# Altium PCB copper_suicide.PcbDoc (part 2 of 6)
Units mm, origin at the board's own origin, x right, y up, seen from the top; angles counter-clockwise.
Board outline 200 x 200 mm, 10 copper layers (Top Layer, Signal Layer 1, Signal Layer 2, Signal Layer 3, Signal Layer 4, Signal Layer 5, Signal Layer 6, Signal Layer 7, Signal Layer 8, Bottom Layer), stack 1.555 mm thick; 36 components, 3934 nets, 1640 pads, 0 vias.
Unrouted connection lines stored in the file: 671.
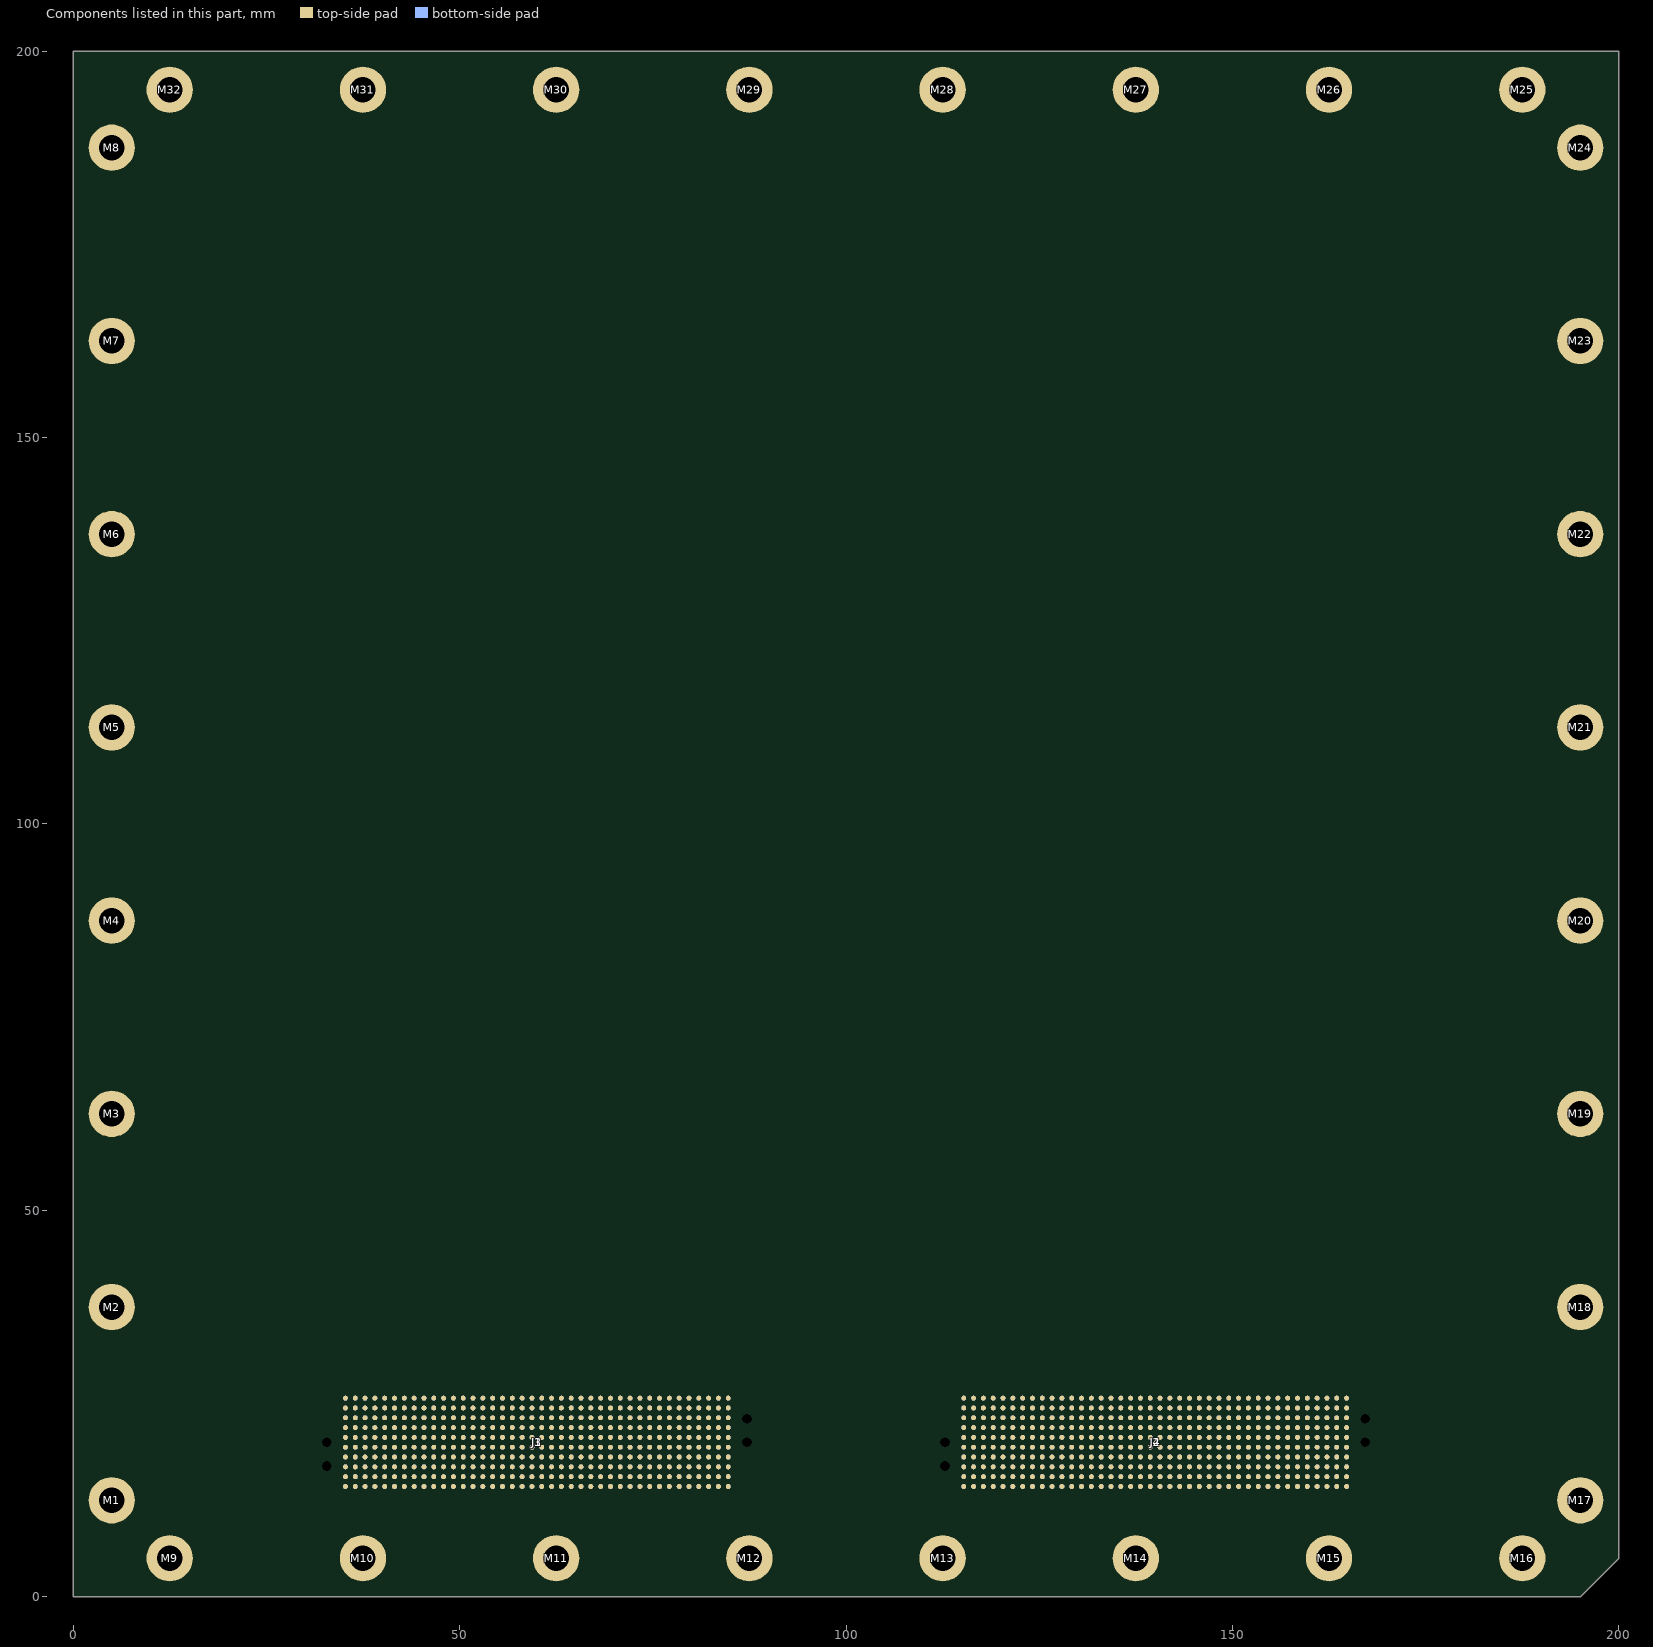
[diagram p2: the components of this part, seen from the top]

## Classes and differential pairs (continued)
net class IL12_31-68_32: IL12_31-68_32.DDRCC.S01C_5_N IL12_31-68_32.DDRCC.S01C_5_P IL12_31-68_32.DDRCC.S2_5 IL12_31-68_32.DDRCC.S3_5 IL12_31-68_32.DDRCC.S4_5 IL12_31-68_32.DDRCC.S5_5 IL12_31-68_32.DDRCC.S6_5 IL12_31-68_32.DDRCC.S7_5 IL12_31-68_32.DDRCC.S8_5 IL12_31-68_32.DDRCC.S9_5 IL12_31-68_32.DDRCC.S10_5 IL12_31-68_32.DDRCC.S11_5 IL12_31-68_32.DDRCC.S12_5 IL12_31-68_32.DDRCC.S13_5 IL12_31-68_32.DDRCC.S14_5 IL12_31-68_32.DDRCC.S15_5 IL12_31-68_32.DDRCC.S16_5 IL12_31-68_32.DDRCC.S17_5 IL12_31-68_32.DDRCC.S18_5 IL12_31-68_32.DDRCC.S19_5 IL12_31-68_32.DDRCC.S20_5 IL12_31-68_32.DDRCC.S21_5 IL12_31-68_32.DDRCC.S22_5 IL12_31-68_32.DDRCC.S23_5 IL12_31-68_32.DDRCC.S24_5 IL12_31-68_32.DDRCC.S25_5 IL12_31-68_32.DDRCC.S26_5 IL12_31-68_32.DDRCC.S27_5 IL12_31-68_32.DDRCC.S28_5 IL12_31-68_32.DDRCC.S29_5 IL12_31-68_32.DDRCC.S30_5 IL12_31-68_32.DDRCC.S31_5 IL12_31-68_32.DDRCC.S32_5 IL12_31-68_32.DDRCC.S33_5 IL12_31-68_32.DDRCC.S34_5 IL12_31-68_32.DDRCC.S35_5 IL12_31-68_32.DDRCC.S36_5 IL12_31-68_32.DDRCC.S37_5 IL12_31-68_32.DDRCC.S38_5 IL12_31-68_32.DDRCC.S39_5 IL12_31-68_32.DDRCC.S40_5 IL12_31-68_32.DDRCC.S41_5 IL12_31-68_32.DDRCC.S42_5 IL12_31-68_32.DDRCC.S43_5 IL12_31-68_32.DDRCC.S44_5 IL12_31-68_32.DDRCC.S45_5 IL12_31-68_32.DDRCC.S46_5 IL12_31-68_32.SDRCC.GPIO8.D0_5 IL12_31-68_32.SDRCC.GPIO8.D1_5 IL12_31-68_32.SDRCC.GPIO8.D2_5 IL12_31-68_32.SDRCC.GPIO8.D3_5 IL12_31-68_32.SDRCC.GPIO8.D4_5 IL12_31-68_32.SDRCC.GPIO8.D5_5 IL12_31-68_32.SDRCC.GPIO8.D6_5 IL12_31-68_32.SDRCC.GPIO8.D7_5 IL12_31-68_32.SDRCC.GPIO15.D01C_5_N IL12_31-68_32.SDRCC.GPIO15.D01C_5_P IL12_31-68_32.SDRCC.GPIO15.D2_5 IL12_31-68_32.SDRCC.GPIO15.D3_5 IL12_31-68_32.SDRCC.GPIO15.D4_5 IL12_31-68_32.SDRCC.GPIO15.D5_5 IL12_31-68_32.SDRCC.GPIO15.D6_5 IL12_31-68_32.SDRCC.GPIO15.D7_5 IL12_31-68_32.SDRCC.GPIO15.D8_5 IL12_31-68_32.SDRCC.GPIO15.D9_5 IL12_31-68_32.SDRCC.GPIO15.D10_5 IL12_31-68_32.SDRCC.GPIO15.D11_5 IL12_31-68_32.SDRCC.GPIO15.D12_5 IL12_31-68_32.SDRCC.GPIO15.D13_5 IL12_31-68_32.SDRCC.GPIO15.D14_5
net class IL12_32-68_33: IL12_32-68_33.DDRCC.S01C_5_N IL12_32-68_33.DDRCC.S01C_5_P IL12_32-68_33.DDRCC.S2_5 IL12_32-68_33.DDRCC.S3_5 IL12_32-68_33.DDRCC.S4_5 IL12_32-68_33.DDRCC.S5_5 IL12_32-68_33.DDRCC.S6_5 IL12_32-68_33.DDRCC.S7_5 IL12_32-68_33.DDRCC.S8_5 IL12_32-68_33.DDRCC.S9_5 IL12_32-68_33.DDRCC.S10_5 IL12_32-68_33.DDRCC.S11_5 IL12_32-68_33.DDRCC.S12_5 IL12_32-68_33.DDRCC.S13_5 IL12_32-68_33.DDRCC.S14_5 IL12_32-68_33.DDRCC.S15_5 IL12_32-68_33.DDRCC.S16_5 IL12_32-68_33.DDRCC.S17_5 IL12_32-68_33.DDRCC.S18_5 IL12_32-68_33.DDRCC.S19_5 IL12_32-68_33.DDRCC.S20_5 IL12_32-68_33.DDRCC.S21_5 IL12_32-68_33.DDRCC.S22_5 IL12_32-68_33.DDRCC.S23_5 IL12_32-68_33.DDRCC.S24_5 IL12_32-68_33.DDRCC.S25_5 IL12_32-68_33.DDRCC.S26_5 IL12_32-68_33.DDRCC.S27_5 IL12_32-68_33.DDRCC.S28_5 IL12_32-68_33.DDRCC.S29_5 IL12_32-68_33.DDRCC.S30_5 IL12_32-68_33.DDRCC.S31_5 IL12_32-68_33.DDRCC.S32_5 IL12_32-68_33.DDRCC.S33_5 IL12_32-68_33.DDRCC.S34_5 IL12_32-68_33.DDRCC.S35_5 IL12_32-68_33.DDRCC.S36_5 IL12_32-68_33.DDRCC.S37_5 IL12_32-68_33.DDRCC.S38_5 IL12_32-68_33.DDRCC.S39_5 IL12_32-68_33.DDRCC.S40_5 IL12_32-68_33.DDRCC.S41_5 IL12_32-68_33.DDRCC.S42_5 IL12_32-68_33.DDRCC.S43_5 IL12_32-68_33.DDRCC.S44_5 IL12_32-68_33.DDRCC.S45_5 IL12_32-68_33.DDRCC.S46_5 IL12_32-68_33.SDRCC.GPIO8.D0_5 IL12_32-68_33.SDRCC.GPIO8.D1_5 IL12_32-68_33.SDRCC.GPIO8.D2_5 IL12_32-68_33.SDRCC.GPIO8.D3_5 IL12_32-68_33.SDRCC.GPIO8.D4_5 IL12_32-68_33.SDRCC.GPIO8.D5_5 IL12_32-68_33.SDRCC.GPIO8.D6_5 IL12_32-68_33.SDRCC.GPIO8.D7_5 IL12_32-68_33.SDRCC.GPIO15.D01C_5_N IL12_32-68_33.SDRCC.GPIO15.D01C_5_P IL12_32-68_33.SDRCC.GPIO15.D2_5 IL12_32-68_33.SDRCC.GPIO15.D3_5 IL12_32-68_33.SDRCC.GPIO15.D4_5 IL12_32-68_33.SDRCC.GPIO15.D5_5 IL12_32-68_33.SDRCC.GPIO15.D6_5 IL12_32-68_33.SDRCC.GPIO15.D7_5 IL12_32-68_33.SDRCC.GPIO15.D8_5 IL12_32-68_33.SDRCC.GPIO15.D9_5 IL12_32-68_33.SDRCC.GPIO15.D10_5 IL12_32-68_33.SDRCC.GPIO15.D11_5 IL12_32-68_33.SDRCC.GPIO15.D12_5 IL12_32-68_33.SDRCC.GPIO15.D13_5 IL12_32-68_33.SDRCC.GPIO15.D14_5
net class IL12_33-J1A: IL12_33-J1A.DDRCC.S01C_5_N IL12_33-J1A.DDRCC.S01C_5_P IL12_33-J1A.DDRCC.S2_5 IL12_33-J1A.DDRCC.S3_5 IL12_33-J1A.DDRCC.S4_5 IL12_33-J1A.DDRCC.S5_5 IL12_33-J1A.DDRCC.S6_5 IL12_33-J1A.DDRCC.S7_5 IL12_33-J1A.DDRCC.S8_5 IL12_33-J1A.DDRCC.S9_5 IL12_33-J1A.DDRCC.S10_5 IL12_33-J1A.DDRCC.S11_5 IL12_33-J1A.DDRCC.S12_5 IL12_33-J1A.DDRCC.S13_5 IL12_33-J1A.DDRCC.S14_5 IL12_33-J1A.DDRCC.S15_5 IL12_33-J1A.DDRCC.S16_5 IL12_33-J1A.DDRCC.S17_5 IL12_33-J1A.DDRCC.S18_5 IL12_33-J1A.DDRCC.S19_5 IL12_33-J1A.DDRCC.S20_5 IL12_33-J1A.DDRCC.S21_5 IL12_33-J1A.DDRCC.S22_5 IL12_33-J1A.DDRCC.S23_5 IL12_33-J1A.DDRCC.S24_5 IL12_33-J1A.DDRCC.S25_5 IL12_33-J1A.DDRCC.S26_5 IL12_33-J1A.DDRCC.S27_5 IL12_33-J1A.DDRCC.S28_5 IL12_33-J1A.DDRCC.S29_5 IL12_33-J1A.DDRCC.S30_5 IL12_33-J1A.DDRCC.S31_5 IL12_33-J1A.DDRCC.S32_5 IL12_33-J1A.DDRCC.S33_5 IL12_33-J1A.DDRCC.S34_5 IL12_33-J1A.DDRCC.S35_5 IL12_33-J1A.DDRCC.S36_5 IL12_33-J1A.DDRCC.S37_5 IL12_33-J1A.DDRCC.S38_5 IL12_33-J1A.DDRCC.S39_5 IL12_33-J1A.DDRCC.S40_5 IL12_33-J1A.DDRCC.S41_5 IL12_33-J1A.DDRCC.S42_5 IL12_33-J1A.DDRCC.S43_5 IL12_33-J1A.DDRCC.S44_5 IL12_33-J1A.DDRCC.S45_5 IL12_33-J1A.DDRCC.S46_5 IL12_33-J1A.SDRCC.GPIO8.D0_5 IL12_33-J1A.SDRCC.GPIO8.D1_5 IL12_33-J1A.SDRCC.GPIO8.D2_5 IL12_33-J1A.SDRCC.GPIO8.D3_5 IL12_33-J1A.SDRCC.GPIO8.D4_5 IL12_33-J1A.SDRCC.GPIO8.D5_5 IL12_33-J1A.SDRCC.GPIO8.D6_5 IL12_33-J1A.SDRCC.GPIO8.D7_5 IL12_33-J1A.SDRCC.GPIO15.D01C_5_N IL12_33-J1A.SDRCC.GPIO15.D01C_5_P IL12_33-J1A.SDRCC.GPIO15.D2_5 IL12_33-J1A.SDRCC.GPIO15.D3_5 IL12_33-J1A.SDRCC.GPIO15.D4_5 IL12_33-J1A.SDRCC.GPIO15.D5_5 IL12_33-J1A.SDRCC.GPIO15.D6_5 IL12_33-J1A.SDRCC.GPIO15.D7_5 IL12_33-J1A.SDRCC.GPIO15.D8_5 IL12_33-J1A.SDRCC.GPIO15.D9_5 IL12_33-J1A.SDRCC.GPIO15.D10_5 IL12_33-J1A.SDRCC.GPIO15.D11_5 IL12_33-J1A.SDRCC.GPIO15.D12_5 IL12_33-J1A.SDRCC.GPIO15.D13_5 IL12_33-J1A.SDRCC.GPIO15.D14_5
net class IL34_10-07_20: IL34_10-07_20.DDRCC.S01C_5_N IL34_10-07_20.DDRCC.S01C_5_P IL34_10-07_20.DDRCC.S2_5 IL34_10-07_20.DDRCC.S3_5 IL34_10-07_20.DDRCC.S4_5 IL34_10-07_20.DDRCC.S5_5 IL34_10-07_20.DDRCC.S6_5 IL34_10-07_20.DDRCC.S7_5 IL34_10-07_20.DDRCC.S8_5 IL34_10-07_20.DDRCC.S9_5 IL34_10-07_20.DDRCC.S10_5 IL34_10-07_20.DDRCC.S11_5 IL34_10-07_20.DDRCC.S12_5 IL34_10-07_20.DDRCC.S13_5 IL34_10-07_20.DDRCC.S14_5 IL34_10-07_20.DDRCC.S15_5 IL34_10-07_20.DDRCC.S16_5 IL34_10-07_20.DDRCC.S17_5 IL34_10-07_20.DDRCC.S18_5 IL34_10-07_20.DDRCC.S19_5 IL34_10-07_20.DDRCC.S20_5 IL34_10-07_20.DDRCC.S21_5 IL34_10-07_20.DDRCC.S22_5 IL34_10-07_20.DDRCC.S23_5 IL34_10-07_20.DDRCC.S24_5 IL34_10-07_20.DDRCC.S25_5 IL34_10-07_20.DDRCC.S26_5 IL34_10-07_20.DDRCC.S27_5 IL34_10-07_20.DDRCC.S28_5 IL34_10-07_20.DDRCC.S29_5 IL34_10-07_20.DDRCC.S30_5 IL34_10-07_20.DDRCC.S31_5 IL34_10-07_20.DDRCC.S32_5 IL34_10-07_20.DDRCC.S33_5 IL34_10-07_20.DDRCC.S34_5 IL34_10-07_20.DDRCC.S35_5 IL34_10-07_20.DDRCC.S36_5 IL34_10-07_20.DDRCC.S37_5 IL34_10-07_20.DDRCC.S38_5 IL34_10-07_20.DDRCC.S39_5 IL34_10-07_20.DDRCC.S40_5 IL34_10-07_20.DDRCC.S41_5 IL34_10-07_20.DDRCC.S42_5 IL34_10-07_20.DDRCC.S43_5 IL34_10-07_20.DDRCC.S44_5 IL34_10-07_20.DDRCC.S45_5 IL34_10-07_20.DDRCC.S46_5 IL34_10-07_20.SDRCC.GPIO8.D0_5 IL34_10-07_20.SDRCC.GPIO8.D1_5 IL34_10-07_20.SDRCC.GPIO8.D2_5 IL34_10-07_20.SDRCC.GPIO8.D3_5 IL34_10-07_20.SDRCC.GPIO8.D4_5 IL34_10-07_20.SDRCC.GPIO8.D5_5 IL34_10-07_20.SDRCC.GPIO8.D6_5 IL34_10-07_20.SDRCC.GPIO8.D7_5 IL34_10-07_20.SDRCC.GPIO15.D01C_5_N IL34_10-07_20.SDRCC.GPIO15.D01C_5_P IL34_10-07_20.SDRCC.GPIO15.D2_5 IL34_10-07_20.SDRCC.GPIO15.D3_5 IL34_10-07_20.SDRCC.GPIO15.D4_5 IL34_10-07_20.SDRCC.GPIO15.D5_5 IL34_10-07_20.SDRCC.GPIO15.D6_5 IL34_10-07_20.SDRCC.GPIO15.D7_5 IL34_10-07_20.SDRCC.GPIO15.D8_5 IL34_10-07_20.SDRCC.GPIO15.D9_5 IL34_10-07_20.SDRCC.GPIO15.D10_5 IL34_10-07_20.SDRCC.GPIO15.D11_5 IL34_10-07_20.SDRCC.GPIO15.D12_5 IL34_10-07_20.SDRCC.GPIO15.D13_5 IL34_10-07_20.SDRCC.GPIO15.D14_5
net class IL34_11-07_21: IL34_11-07_21.DDRCC.S01C_5_N IL34_11-07_21.DDRCC.S01C_5_P IL34_11-07_21.DDRCC.S2_5 IL34_11-07_21.DDRCC.S3_5 IL34_11-07_21.DDRCC.S4_5 IL34_11-07_21.DDRCC.S5_5 IL34_11-07_21.DDRCC.S6_5 IL34_11-07_21.DDRCC.S7_5 IL34_11-07_21.DDRCC.S8_5 IL34_11-07_21.DDRCC.S9_5 IL34_11-07_21.DDRCC.S10_5 IL34_11-07_21.DDRCC.S11_5 IL34_11-07_21.DDRCC.S12_5 IL34_11-07_21.DDRCC.S13_5 IL34_11-07_21.DDRCC.S14_5 IL34_11-07_21.DDRCC.S15_5 IL34_11-07_21.DDRCC.S16_5 IL34_11-07_21.DDRCC.S17_5 IL34_11-07_21.DDRCC.S18_5 IL34_11-07_21.DDRCC.S19_5 IL34_11-07_21.DDRCC.S20_5 IL34_11-07_21.DDRCC.S21_5 IL34_11-07_21.DDRCC.S22_5 IL34_11-07_21.DDRCC.S23_5 IL34_11-07_21.DDRCC.S24_5 IL34_11-07_21.DDRCC.S25_5 IL34_11-07_21.DDRCC.S26_5 IL34_11-07_21.DDRCC.S27_5 IL34_11-07_21.DDRCC.S28_5 IL34_11-07_21.DDRCC.S29_5 IL34_11-07_21.DDRCC.S30_5 IL34_11-07_21.DDRCC.S31_5 IL34_11-07_21.DDRCC.S32_5 IL34_11-07_21.DDRCC.S33_5 IL34_11-07_21.DDRCC.S34_5 IL34_11-07_21.DDRCC.S35_5 IL34_11-07_21.DDRCC.S36_5 IL34_11-07_21.DDRCC.S37_5 IL34_11-07_21.DDRCC.S38_5 IL34_11-07_21.DDRCC.S39_5 IL34_11-07_21.DDRCC.S40_5 IL34_11-07_21.DDRCC.S41_5 IL34_11-07_21.DDRCC.S42_5 IL34_11-07_21.DDRCC.S43_5 IL34_11-07_21.DDRCC.S44_5 IL34_11-07_21.DDRCC.S45_5 IL34_11-07_21.DDRCC.S46_5 IL34_11-07_21.SDRCC.GPIO8.D0_5 IL34_11-07_21.SDRCC.GPIO8.D1_5 IL34_11-07_21.SDRCC.GPIO8.D2_5 IL34_11-07_21.SDRCC.GPIO8.D3_5 IL34_11-07_21.SDRCC.GPIO8.D4_5 IL34_11-07_21.SDRCC.GPIO8.D5_5 IL34_11-07_21.SDRCC.GPIO8.D6_5 IL34_11-07_21.SDRCC.GPIO8.D7_5 IL34_11-07_21.SDRCC.GPIO15.D01C_5_N IL34_11-07_21.SDRCC.GPIO15.D01C_5_P IL34_11-07_21.SDRCC.GPIO15.D2_5 IL34_11-07_21.SDRCC.GPIO15.D3_5 IL34_11-07_21.SDRCC.GPIO15.D4_5 IL34_11-07_21.SDRCC.GPIO15.D5_5 IL34_11-07_21.SDRCC.GPIO15.D6_5 IL34_11-07_21.SDRCC.GPIO15.D7_5 IL34_11-07_21.SDRCC.GPIO15.D8_5 IL34_11-07_21.SDRCC.GPIO15.D9_5 IL34_11-07_21.SDRCC.GPIO15.D10_5 IL34_11-07_21.SDRCC.GPIO15.D11_5 IL34_11-07_21.SDRCC.GPIO15.D12_5 IL34_11-07_21.SDRCC.GPIO15.D13_5 IL34_11-07_21.SDRCC.GPIO15.D14_5
net class IL34_12-07_22: IL34_12-07_22.DDRCC.S01C_5_N IL34_12-07_22.DDRCC.S01C_5_P IL34_12-07_22.DDRCC.S2_5 IL34_12-07_22.DDRCC.S3_5 IL34_12-07_22.DDRCC.S4_5 IL34_12-07_22.DDRCC.S5_5 IL34_12-07_22.DDRCC.S6_5 IL34_12-07_22.DDRCC.S7_5 IL34_12-07_22.DDRCC.S8_5 IL34_12-07_22.DDRCC.S9_5 IL34_12-07_22.DDRCC.S10_5 IL34_12-07_22.DDRCC.S11_5 IL34_12-07_22.DDRCC.S12_5 IL34_12-07_22.DDRCC.S13_5 IL34_12-07_22.DDRCC.S14_5 IL34_12-07_22.DDRCC.S15_5 IL34_12-07_22.DDRCC.S16_5 IL34_12-07_22.DDRCC.S17_5 IL34_12-07_22.DDRCC.S18_5 IL34_12-07_22.DDRCC.S19_5 IL34_12-07_22.DDRCC.S20_5 IL34_12-07_22.DDRCC.S21_5 IL34_12-07_22.DDRCC.S22_5 IL34_12-07_22.DDRCC.S23_5 IL34_12-07_22.DDRCC.S24_5 IL34_12-07_22.DDRCC.S25_5 IL34_12-07_22.DDRCC.S26_5 IL34_12-07_22.DDRCC.S27_5 IL34_12-07_22.DDRCC.S28_5 IL34_12-07_22.DDRCC.S29_5 IL34_12-07_22.DDRCC.S30_5 IL34_12-07_22.DDRCC.S31_5 IL34_12-07_22.DDRCC.S32_5 IL34_12-07_22.DDRCC.S33_5 IL34_12-07_22.DDRCC.S34_5 IL34_12-07_22.DDRCC.S35_5 IL34_12-07_22.DDRCC.S36_5 IL34_12-07_22.DDRCC.S37_5 IL34_12-07_22.DDRCC.S38_5 IL34_12-07_22.DDRCC.S39_5 IL34_12-07_22.DDRCC.S40_5 IL34_12-07_22.DDRCC.S41_5 IL34_12-07_22.DDRCC.S42_5 IL34_12-07_22.DDRCC.S43_5 IL34_12-07_22.DDRCC.S44_5 IL34_12-07_22.DDRCC.S45_5 IL34_12-07_22.DDRCC.S46_5 IL34_12-07_22.SDRCC.GPIO8.D0_5 IL34_12-07_22.SDRCC.GPIO8.D1_5 IL34_12-07_22.SDRCC.GPIO8.D2_5 IL34_12-07_22.SDRCC.GPIO8.D3_5 IL34_12-07_22.SDRCC.GPIO8.D4_5 IL34_12-07_22.SDRCC.GPIO8.D5_5 IL34_12-07_22.SDRCC.GPIO8.D6_5 IL34_12-07_22.SDRCC.GPIO8.D7_5 IL34_12-07_22.SDRCC.GPIO15.D01C_5_N IL34_12-07_22.SDRCC.GPIO15.D01C_5_P IL34_12-07_22.SDRCC.GPIO15.D2_5 IL34_12-07_22.SDRCC.GPIO15.D3_5 IL34_12-07_22.SDRCC.GPIO15.D4_5 IL34_12-07_22.SDRCC.GPIO15.D5_5 IL34_12-07_22.SDRCC.GPIO15.D6_5 IL34_12-07_22.SDRCC.GPIO15.D7_5 IL34_12-07_22.SDRCC.GPIO15.D8_5 IL34_12-07_22.SDRCC.GPIO15.D9_5 IL34_12-07_22.SDRCC.GPIO15.D10_5 IL34_12-07_22.SDRCC.GPIO15.D11_5 IL34_12-07_22.SDRCC.GPIO15.D12_5 IL34_12-07_22.SDRCC.GPIO15.D13_5 IL34_12-07_22.SDRCC.GPIO15.D14_5
net class IL34_13-07_23: IL34_13-07_23.DDRCC.S01C_5_N IL34_13-07_23.DDRCC.S01C_5_P IL34_13-07_23.DDRCC.S2_5 IL34_13-07_23.DDRCC.S3_5 IL34_13-07_23.DDRCC.S4_5 IL34_13-07_23.DDRCC.S5_5 IL34_13-07_23.DDRCC.S6_5 IL34_13-07_23.DDRCC.S7_5 IL34_13-07_23.DDRCC.S8_5 IL34_13-07_23.DDRCC.S9_5 IL34_13-07_23.DDRCC.S10_5 IL34_13-07_23.DDRCC.S11_5 IL34_13-07_23.DDRCC.S12_5 IL34_13-07_23.DDRCC.S13_5 IL34_13-07_23.DDRCC.S14_5 IL34_13-07_23.DDRCC.S15_5 IL34_13-07_23.DDRCC.S16_5 IL34_13-07_23.DDRCC.S17_5 IL34_13-07_23.DDRCC.S18_5 IL34_13-07_23.DDRCC.S19_5 IL34_13-07_23.DDRCC.S20_5 IL34_13-07_23.DDRCC.S21_5 IL34_13-07_23.DDRCC.S22_5 IL34_13-07_23.DDRCC.S23_5 IL34_13-07_23.DDRCC.S24_5 IL34_13-07_23.DDRCC.S25_5 IL34_13-07_23.DDRCC.S26_5 IL34_13-07_23.DDRCC.S27_5 IL34_13-07_23.DDRCC.S28_5 IL34_13-07_23.DDRCC.S29_5 IL34_13-07_23.DDRCC.S30_5 IL34_13-07_23.DDRCC.S31_5 IL34_13-07_23.DDRCC.S32_5 IL34_13-07_23.DDRCC.S33_5 IL34_13-07_23.DDRCC.S34_5 IL34_13-07_23.DDRCC.S35_5 IL34_13-07_23.DDRCC.S36_5 IL34_13-07_23.DDRCC.S37_5 IL34_13-07_23.DDRCC.S38_5 IL34_13-07_23.DDRCC.S39_5 IL34_13-07_23.DDRCC.S40_5 IL34_13-07_23.DDRCC.S41_5 IL34_13-07_23.DDRCC.S42_5 IL34_13-07_23.DDRCC.S43_5 IL34_13-07_23.DDRCC.S44_5 IL34_13-07_23.DDRCC.S45_5 IL34_13-07_23.DDRCC.S46_5 IL34_13-07_23.SDRCC.GPIO8.D0_5 IL34_13-07_23.SDRCC.GPIO8.D1_5 IL34_13-07_23.SDRCC.GPIO8.D2_5 IL34_13-07_23.SDRCC.GPIO8.D3_5 IL34_13-07_23.SDRCC.GPIO8.D4_5 IL34_13-07_23.SDRCC.GPIO8.D5_5 IL34_13-07_23.SDRCC.GPIO8.D6_5 IL34_13-07_23.SDRCC.GPIO8.D7_5 IL34_13-07_23.SDRCC.GPIO15.D01C_5_N IL34_13-07_23.SDRCC.GPIO15.D01C_5_P IL34_13-07_23.SDRCC.GPIO15.D2_5 IL34_13-07_23.SDRCC.GPIO15.D3_5 IL34_13-07_23.SDRCC.GPIO15.D4_5 IL34_13-07_23.SDRCC.GPIO15.D5_5 IL34_13-07_23.SDRCC.GPIO15.D6_5 IL34_13-07_23.SDRCC.GPIO15.D7_5 IL34_13-07_23.SDRCC.GPIO15.D8_5 IL34_13-07_23.SDRCC.GPIO15.D9_5 IL34_13-07_23.SDRCC.GPIO15.D10_5 IL34_13-07_23.SDRCC.GPIO15.D11_5 IL34_13-07_23.SDRCC.GPIO15.D12_5 IL34_13-07_23.SDRCC.GPIO15.D13_5 IL34_13-07_23.SDRCC.GPIO15.D14_5
net class IL34_20-07_30: IL34_20-07_30.DDRCC.S01C_5_N IL34_20-07_30.DDRCC.S01C_5_P IL34_20-07_30.DDRCC.S2_5 IL34_20-07_30.DDRCC.S3_5 IL34_20-07_30.DDRCC.S4_5 IL34_20-07_30.DDRCC.S5_5 IL34_20-07_30.DDRCC.S6_5 IL34_20-07_30.DDRCC.S7_5 IL34_20-07_30.DDRCC.S8_5 IL34_20-07_30.DDRCC.S9_5 IL34_20-07_30.DDRCC.S10_5 IL34_20-07_30.DDRCC.S11_5 IL34_20-07_30.DDRCC.S12_5 IL34_20-07_30.DDRCC.S13_5 IL34_20-07_30.DDRCC.S14_5 IL34_20-07_30.DDRCC.S15_5 IL34_20-07_30.DDRCC.S16_5 IL34_20-07_30.DDRCC.S17_5 IL34_20-07_30.DDRCC.S18_5 IL34_20-07_30.DDRCC.S19_5 IL34_20-07_30.DDRCC.S20_5 IL34_20-07_30.DDRCC.S21_5 IL34_20-07_30.DDRCC.S22_5 IL34_20-07_30.DDRCC.S23_5 IL34_20-07_30.DDRCC.S24_5 IL34_20-07_30.DDRCC.S25_5 IL34_20-07_30.DDRCC.S26_5 IL34_20-07_30.DDRCC.S27_5 IL34_20-07_30.DDRCC.S28_5 IL34_20-07_30.DDRCC.S29_5 IL34_20-07_30.DDRCC.S30_5 IL34_20-07_30.DDRCC.S31_5 IL34_20-07_30.DDRCC.S32_5 IL34_20-07_30.DDRCC.S33_5 IL34_20-07_30.DDRCC.S34_5 IL34_20-07_30.DDRCC.S35_5 IL34_20-07_30.DDRCC.S36_5 IL34_20-07_30.DDRCC.S37_5 IL34_20-07_30.DDRCC.S38_5 IL34_20-07_30.DDRCC.S39_5 IL34_20-07_30.DDRCC.S40_5 IL34_20-07_30.DDRCC.S41_5 IL34_20-07_30.DDRCC.S42_5 IL34_20-07_30.DDRCC.S43_5 IL34_20-07_30.DDRCC.S44_5 IL34_20-07_30.DDRCC.S45_5 IL34_20-07_30.DDRCC.S46_5 IL34_20-07_30.SDRCC.GPIO8.D0_5 IL34_20-07_30.SDRCC.GPIO8.D1_5 IL34_20-07_30.SDRCC.GPIO8.D2_5 IL34_20-07_30.SDRCC.GPIO8.D3_5 IL34_20-07_30.SDRCC.GPIO8.D4_5 IL34_20-07_30.SDRCC.GPIO8.D5_5 IL34_20-07_30.SDRCC.GPIO8.D6_5 IL34_20-07_30.SDRCC.GPIO8.D7_5 IL34_20-07_30.SDRCC.GPIO15.D01C_5_N IL34_20-07_30.SDRCC.GPIO15.D01C_5_P IL34_20-07_30.SDRCC.GPIO15.D2_5 IL34_20-07_30.SDRCC.GPIO15.D3_5 IL34_20-07_30.SDRCC.GPIO15.D4_5 IL34_20-07_30.SDRCC.GPIO15.D5_5 IL34_20-07_30.SDRCC.GPIO15.D6_5 IL34_20-07_30.SDRCC.GPIO15.D7_5 IL34_20-07_30.SDRCC.GPIO15.D8_5 IL34_20-07_30.SDRCC.GPIO15.D9_5 IL34_20-07_30.SDRCC.GPIO15.D10_5 IL34_20-07_30.SDRCC.GPIO15.D11_5 IL34_20-07_30.SDRCC.GPIO15.D12_5 IL34_20-07_30.SDRCC.GPIO15.D13_5 IL34_20-07_30.SDRCC.GPIO15.D14_5
net class IL34_21-07_31: IL34_21-07_31.DDRCC.S01C_5_N IL34_21-07_31.DDRCC.S01C_5_P IL34_21-07_31.DDRCC.S2_5 IL34_21-07_31.DDRCC.S3_5 IL34_21-07_31.DDRCC.S4_5 IL34_21-07_31.DDRCC.S5_5 IL34_21-07_31.DDRCC.S6_5 IL34_21-07_31.DDRCC.S7_5 IL34_21-07_31.DDRCC.S8_5 IL34_21-07_31.DDRCC.S9_5 IL34_21-07_31.DDRCC.S10_5 IL34_21-07_31.DDRCC.S11_5 IL34_21-07_31.DDRCC.S12_5 IL34_21-07_31.DDRCC.S13_5 IL34_21-07_31.DDRCC.S14_5 IL34_21-07_31.DDRCC.S15_5 IL34_21-07_31.DDRCC.S16_5 IL34_21-07_31.DDRCC.S17_5 IL34_21-07_31.DDRCC.S18_5 IL34_21-07_31.DDRCC.S19_5 IL34_21-07_31.DDRCC.S20_5 IL34_21-07_31.DDRCC.S21_5 IL34_21-07_31.DDRCC.S22_5 IL34_21-07_31.DDRCC.S23_5 IL34_21-07_31.DDRCC.S24_5 IL34_21-07_31.DDRCC.S25_5 IL34_21-07_31.DDRCC.S26_5 IL34_21-07_31.DDRCC.S27_5 IL34_21-07_31.DDRCC.S28_5 IL34_21-07_31.DDRCC.S29_5 IL34_21-07_31.DDRCC.S30_5 IL34_21-07_31.DDRCC.S31_5 IL34_21-07_31.DDRCC.S32_5 IL34_21-07_31.DDRCC.S33_5 IL34_21-07_31.DDRCC.S34_5 IL34_21-07_31.DDRCC.S35_5 IL34_21-07_31.DDRCC.S36_5 IL34_21-07_31.DDRCC.S37_5 IL34_21-07_31.DDRCC.S38_5 IL34_21-07_31.DDRCC.S39_5 IL34_21-07_31.DDRCC.S40_5 IL34_21-07_31.DDRCC.S41_5 IL34_21-07_31.DDRCC.S42_5 IL34_21-07_31.DDRCC.S43_5 IL34_21-07_31.DDRCC.S44_5 IL34_21-07_31.DDRCC.S45_5 IL34_21-07_31.DDRCC.S46_5 IL34_21-07_31.SDRCC.GPIO8.D0_5 IL34_21-07_31.SDRCC.GPIO8.D1_5 IL34_21-07_31.SDRCC.GPIO8.D2_5 IL34_21-07_31.SDRCC.GPIO8.D3_5 IL34_21-07_31.SDRCC.GPIO8.D4_5 IL34_21-07_31.SDRCC.GPIO8.D5_5 IL34_21-07_31.SDRCC.GPIO8.D6_5 IL34_21-07_31.SDRCC.GPIO8.D7_5 IL34_21-07_31.SDRCC.GPIO15.D01C_5_N IL34_21-07_31.SDRCC.GPIO15.D01C_5_P IL34_21-07_31.SDRCC.GPIO15.D2_5 IL34_21-07_31.SDRCC.GPIO15.D3_5 IL34_21-07_31.SDRCC.GPIO15.D4_5 IL34_21-07_31.SDRCC.GPIO15.D5_5 IL34_21-07_31.SDRCC.GPIO15.D6_5 IL34_21-07_31.SDRCC.GPIO15.D7_5 IL34_21-07_31.SDRCC.GPIO15.D8_5 IL34_21-07_31.SDRCC.GPIO15.D9_5 IL34_21-07_31.SDRCC.GPIO15.D10_5 IL34_21-07_31.SDRCC.GPIO15.D11_5 IL34_21-07_31.SDRCC.GPIO15.D12_5 IL34_21-07_31.SDRCC.GPIO15.D13_5 IL34_21-07_31.SDRCC.GPIO15.D14_5
net class IL34_22-07_32: IL34_22-07_32.DDRCC.S01C_5_N IL34_22-07_32.DDRCC.S01C_5_P IL34_22-07_32.DDRCC.S2_5 IL34_22-07_32.DDRCC.S3_5 IL34_22-07_32.DDRCC.S4_5 IL34_22-07_32.DDRCC.S5_5 IL34_22-07_32.DDRCC.S6_5 IL34_22-07_32.DDRCC.S7_5 IL34_22-07_32.DDRCC.S8_5 IL34_22-07_32.DDRCC.S9_5 IL34_22-07_32.DDRCC.S10_5 IL34_22-07_32.DDRCC.S11_5 IL34_22-07_32.DDRCC.S12_5 IL34_22-07_32.DDRCC.S13_5 IL34_22-07_32.DDRCC.S14_5 IL34_22-07_32.DDRCC.S15_5 IL34_22-07_32.DDRCC.S16_5 IL34_22-07_32.DDRCC.S17_5 IL34_22-07_32.DDRCC.S18_5 IL34_22-07_32.DDRCC.S19_5 IL34_22-07_32.DDRCC.S20_5 IL34_22-07_32.DDRCC.S21_5 IL34_22-07_32.DDRCC.S22_5 IL34_22-07_32.DDRCC.S23_5 IL34_22-07_32.DDRCC.S24_5 IL34_22-07_32.DDRCC.S25_5 IL34_22-07_32.DDRCC.S26_5 IL34_22-07_32.DDRCC.S27_5 IL34_22-07_32.DDRCC.S28_5 IL34_22-07_32.DDRCC.S29_5 IL34_22-07_32.DDRCC.S30_5 IL34_22-07_32.DDRCC.S31_5 IL34_22-07_32.DDRCC.S32_5 IL34_22-07_32.DDRCC.S33_5 IL34_22-07_32.DDRCC.S34_5 IL34_22-07_32.DDRCC.S35_5 IL34_22-07_32.DDRCC.S36_5 IL34_22-07_32.DDRCC.S37_5 IL34_22-07_32.DDRCC.S38_5 IL34_22-07_32.DDRCC.S39_5 IL34_22-07_32.DDRCC.S40_5 IL34_22-07_32.DDRCC.S41_5 IL34_22-07_32.DDRCC.S42_5 IL34_22-07_32.DDRCC.S43_5 IL34_22-07_32.DDRCC.S44_5 IL34_22-07_32.DDRCC.S45_5 IL34_22-07_32.DDRCC.S46_5 IL34_22-07_32.SDRCC.GPIO8.D0_5 IL34_22-07_32.SDRCC.GPIO8.D1_5 IL34_22-07_32.SDRCC.GPIO8.D2_5 IL34_22-07_32.SDRCC.GPIO8.D3_5 IL34_22-07_32.SDRCC.GPIO8.D4_5 IL34_22-07_32.SDRCC.GPIO8.D5_5 IL34_22-07_32.SDRCC.GPIO8.D6_5 IL34_22-07_32.SDRCC.GPIO8.D7_5 IL34_22-07_32.SDRCC.GPIO15.D01C_5_N IL34_22-07_32.SDRCC.GPIO15.D01C_5_P IL34_22-07_32.SDRCC.GPIO15.D2_5 IL34_22-07_32.SDRCC.GPIO15.D3_5 IL34_22-07_32.SDRCC.GPIO15.D4_5 IL34_22-07_32.SDRCC.GPIO15.D5_5 IL34_22-07_32.SDRCC.GPIO15.D6_5 IL34_22-07_32.SDRCC.GPIO15.D7_5 IL34_22-07_32.SDRCC.GPIO15.D8_5 IL34_22-07_32.SDRCC.GPIO15.D9_5 IL34_22-07_32.SDRCC.GPIO15.D10_5 IL34_22-07_32.SDRCC.GPIO15.D11_5 IL34_22-07_32.SDRCC.GPIO15.D12_5 IL34_22-07_32.SDRCC.GPIO15.D13_5 IL34_22-07_32.SDRCC.GPIO15.D14_5
net class IL34_23-07_33: IL34_23-07_33.DDRCC.S01C_5_N IL34_23-07_33.DDRCC.S01C_5_P IL34_23-07_33.DDRCC.S2_5 IL34_23-07_33.DDRCC.S3_5 IL34_23-07_33.DDRCC.S4_5 IL34_23-07_33.DDRCC.S5_5 IL34_23-07_33.DDRCC.S6_5 IL34_23-07_33.DDRCC.S7_5 IL34_23-07_33.DDRCC.S8_5 IL34_23-07_33.DDRCC.S9_5 IL34_23-07_33.DDRCC.S10_5 IL34_23-07_33.DDRCC.S11_5 IL34_23-07_33.DDRCC.S12_5 IL34_23-07_33.DDRCC.S13_5 IL34_23-07_33.DDRCC.S14_5 IL34_23-07_33.DDRCC.S15_5 IL34_23-07_33.DDRCC.S16_5 IL34_23-07_33.DDRCC.S17_5 IL34_23-07_33.DDRCC.S18_5 IL34_23-07_33.DDRCC.S19_5 IL34_23-07_33.DDRCC.S20_5 IL34_23-07_33.DDRCC.S21_5 IL34_23-07_33.DDRCC.S22_5 IL34_23-07_33.DDRCC.S23_5 IL34_23-07_33.DDRCC.S24_5 IL34_23-07_33.DDRCC.S25_5 IL34_23-07_33.DDRCC.S26_5 IL34_23-07_33.DDRCC.S27_5 IL34_23-07_33.DDRCC.S28_5 IL34_23-07_33.DDRCC.S29_5 IL34_23-07_33.DDRCC.S30_5 IL34_23-07_33.DDRCC.S31_5 IL34_23-07_33.DDRCC.S32_5 IL34_23-07_33.DDRCC.S33_5 IL34_23-07_33.DDRCC.S34_5 IL34_23-07_33.DDRCC.S35_5 IL34_23-07_33.DDRCC.S36_5 IL34_23-07_33.DDRCC.S37_5 IL34_23-07_33.DDRCC.S38_5 IL34_23-07_33.DDRCC.S39_5 IL34_23-07_33.DDRCC.S40_5 IL34_23-07_33.DDRCC.S41_5 IL34_23-07_33.DDRCC.S42_5 IL34_23-07_33.DDRCC.S43_5 IL34_23-07_33.DDRCC.S44_5 IL34_23-07_33.DDRCC.S45_5 IL34_23-07_33.DDRCC.S46_5 IL34_23-07_33.SDRCC.GPIO8.D0_5 IL34_23-07_33.SDRCC.GPIO8.D1_5 IL34_23-07_33.SDRCC.GPIO8.D2_5 IL34_23-07_33.SDRCC.GPIO8.D3_5 IL34_23-07_33.SDRCC.GPIO8.D4_5 IL34_23-07_33.SDRCC.GPIO8.D5_5 IL34_23-07_33.SDRCC.GPIO8.D6_5 IL34_23-07_33.SDRCC.GPIO8.D7_5 IL34_23-07_33.SDRCC.GPIO15.D01C_5_N IL34_23-07_33.SDRCC.GPIO15.D01C_5_P IL34_23-07_33.SDRCC.GPIO15.D2_5 IL34_23-07_33.SDRCC.GPIO15.D3_5 IL34_23-07_33.SDRCC.GPIO15.D4_5 IL34_23-07_33.SDRCC.GPIO15.D5_5 IL34_23-07_33.SDRCC.GPIO15.D6_5 IL34_23-07_33.SDRCC.GPIO15.D7_5 IL34_23-07_33.SDRCC.GPIO15.D8_5 IL34_23-07_33.SDRCC.GPIO15.D9_5 IL34_23-07_33.SDRCC.GPIO15.D10_5 IL34_23-07_33.SDRCC.GPIO15.D11_5 IL34_23-07_33.SDRCC.GPIO15.D12_5 IL34_23-07_33.SDRCC.GPIO15.D13_5 IL34_23-07_33.SDRCC.GPIO15.D14_5
net class IL68_00-07_10: IL68_00-07_10.DDRCC.S01C_5_N IL68_00-07_10.DDRCC.S01C_5_P IL68_00-07_10.DDRCC.S2_5 IL68_00-07_10.DDRCC.S3_5 IL68_00-07_10.DDRCC.S4_5 IL68_00-07_10.DDRCC.S5_5 IL68_00-07_10.DDRCC.S6_5 IL68_00-07_10.DDRCC.S7_5 IL68_00-07_10.DDRCC.S8_5 IL68_00-07_10.DDRCC.S9_5 IL68_00-07_10.DDRCC.S10_5 IL68_00-07_10.DDRCC.S11_5 IL68_00-07_10.DDRCC.S12_5 IL68_00-07_10.DDRCC.S13_5 IL68_00-07_10.DDRCC.S14_5 IL68_00-07_10.DDRCC.S15_5 IL68_00-07_10.DDRCC.S16_5 IL68_00-07_10.DDRCC.S17_5 IL68_00-07_10.DDRCC.S18_5 IL68_00-07_10.DDRCC.S19_5 IL68_00-07_10.DDRCC.S20_5 IL68_00-07_10.DDRCC.S21_5 IL68_00-07_10.DDRCC.S22_5 IL68_00-07_10.DDRCC.S23_5 IL68_00-07_10.DDRCC.S24_5 IL68_00-07_10.DDRCC.S25_5 IL68_00-07_10.DDRCC.S26_5 IL68_00-07_10.DDRCC.S27_5 IL68_00-07_10.DDRCC.S28_5 IL68_00-07_10.DDRCC.S29_5 IL68_00-07_10.DDRCC.S30_5 IL68_00-07_10.DDRCC.S31_5 IL68_00-07_10.DDRCC.S32_5 IL68_00-07_10.DDRCC.S33_5 IL68_00-07_10.DDRCC.S34_5 IL68_00-07_10.DDRCC.S35_5 IL68_00-07_10.DDRCC.S36_5 IL68_00-07_10.DDRCC.S37_5 IL68_00-07_10.DDRCC.S38_5 IL68_00-07_10.DDRCC.S39_5 IL68_00-07_10.DDRCC.S40_5 IL68_00-07_10.DDRCC.S41_5 IL68_00-07_10.DDRCC.S42_5 IL68_00-07_10.DDRCC.S43_5 IL68_00-07_10.DDRCC.S44_5 IL68_00-07_10.DDRCC.S45_5 IL68_00-07_10.DDRCC.S46_5 IL68_00-07_10.SDRCC.GPIO8.D0_5 IL68_00-07_10.SDRCC.GPIO8.D1_5 IL68_00-07_10.SDRCC.GPIO8.D2_5 IL68_00-07_10.SDRCC.GPIO8.D3_5 IL68_00-07_10.SDRCC.GPIO8.D4_5 IL68_00-07_10.SDRCC.GPIO8.D5_5 IL68_00-07_10.SDRCC.GPIO8.D6_5 IL68_00-07_10.SDRCC.GPIO8.D7_5 IL68_00-07_10.SDRCC.GPIO15.D01C_5_N IL68_00-07_10.SDRCC.GPIO15.D01C_5_P IL68_00-07_10.SDRCC.GPIO15.D2_5 IL68_00-07_10.SDRCC.GPIO15.D3_5 IL68_00-07_10.SDRCC.GPIO15.D4_5 IL68_00-07_10.SDRCC.GPIO15.D5_5 IL68_00-07_10.SDRCC.GPIO15.D6_5 IL68_00-07_10.SDRCC.GPIO15.D7_5 IL68_00-07_10.SDRCC.GPIO15.D8_5 IL68_00-07_10.SDRCC.GPIO15.D9_5 IL68_00-07_10.SDRCC.GPIO15.D10_5 IL68_00-07_10.SDRCC.GPIO15.D11_5 IL68_00-07_10.SDRCC.GPIO15.D12_5 IL68_00-07_10.SDRCC.GPIO15.D13_5 IL68_00-07_10.SDRCC.GPIO15.D14_5
net class IL68_01-07_11: IL68_01-07_11.DDRCC.S01C_5_N IL68_01-07_11.DDRCC.S01C_5_P IL68_01-07_11.DDRCC.S2_5 IL68_01-07_11.DDRCC.S3_5 IL68_01-07_11.DDRCC.S4_5 IL68_01-07_11.DDRCC.S5_5 IL68_01-07_11.DDRCC.S6_5 IL68_01-07_11.DDRCC.S7_5 IL68_01-07_11.DDRCC.S8_5 IL68_01-07_11.DDRCC.S9_5 IL68_01-07_11.DDRCC.S10_5 IL68_01-07_11.DDRCC.S11_5 IL68_01-07_11.DDRCC.S12_5 IL68_01-07_11.DDRCC.S13_5 IL68_01-07_11.DDRCC.S14_5 IL68_01-07_11.DDRCC.S15_5 IL68_01-07_11.DDRCC.S16_5 IL68_01-07_11.DDRCC.S17_5 IL68_01-07_11.DDRCC.S18_5 IL68_01-07_11.DDRCC.S19_5 IL68_01-07_11.DDRCC.S20_5 IL68_01-07_11.DDRCC.S21_5 IL68_01-07_11.DDRCC.S22_5 IL68_01-07_11.DDRCC.S23_5 IL68_01-07_11.DDRCC.S24_5 IL68_01-07_11.DDRCC.S25_5 IL68_01-07_11.DDRCC.S26_5 IL68_01-07_11.DDRCC.S27_5 IL68_01-07_11.DDRCC.S28_5 IL68_01-07_11.DDRCC.S29_5 IL68_01-07_11.DDRCC.S30_5 IL68_01-07_11.DDRCC.S31_5 IL68_01-07_11.DDRCC.S32_5 IL68_01-07_11.DDRCC.S33_5 IL68_01-07_11.DDRCC.S34_5 IL68_01-07_11.DDRCC.S35_5 IL68_01-07_11.DDRCC.S36_5 IL68_01-07_11.DDRCC.S37_5 IL68_01-07_11.DDRCC.S38_5 IL68_01-07_11.DDRCC.S39_5 IL68_01-07_11.DDRCC.S40_5 IL68_01-07_11.DDRCC.S41_5 IL68_01-07_11.DDRCC.S42_5 IL68_01-07_11.DDRCC.S43_5 IL68_01-07_11.DDRCC.S44_5 IL68_01-07_11.DDRCC.S45_5 IL68_01-07_11.DDRCC.S46_5 IL68_01-07_11.SDRCC.GPIO8.D0_5 IL68_01-07_11.SDRCC.GPIO8.D1_5 IL68_01-07_11.SDRCC.GPIO8.D2_5 IL68_01-07_11.SDRCC.GPIO8.D3_5 IL68_01-07_11.SDRCC.GPIO8.D4_5 IL68_01-07_11.SDRCC.GPIO8.D5_5 IL68_01-07_11.SDRCC.GPIO8.D6_5 IL68_01-07_11.SDRCC.GPIO8.D7_5 IL68_01-07_11.SDRCC.GPIO15.D01C_5_N IL68_01-07_11.SDRCC.GPIO15.D01C_5_P IL68_01-07_11.SDRCC.GPIO15.D2_5 IL68_01-07_11.SDRCC.GPIO15.D3_5 IL68_01-07_11.SDRCC.GPIO15.D4_5 IL68_01-07_11.SDRCC.GPIO15.D5_5 IL68_01-07_11.SDRCC.GPIO15.D6_5 IL68_01-07_11.SDRCC.GPIO15.D7_5 IL68_01-07_11.SDRCC.GPIO15.D8_5 IL68_01-07_11.SDRCC.GPIO15.D9_5 IL68_01-07_11.SDRCC.GPIO15.D10_5 IL68_01-07_11.SDRCC.GPIO15.D11_5 IL68_01-07_11.SDRCC.GPIO15.D12_5 IL68_01-07_11.SDRCC.GPIO15.D13_5 IL68_01-07_11.SDRCC.GPIO15.D14_5
net class IL68_02-07_12: IL68_02-07_12.DDRCC.S01C_5_N IL68_02-07_12.DDRCC.S01C_5_P IL68_02-07_12.DDRCC.S2_5 IL68_02-07_12.DDRCC.S3_5 IL68_02-07_12.DDRCC.S4_5 IL68_02-07_12.DDRCC.S5_5 IL68_02-07_12.DDRCC.S6_5 IL68_02-07_12.DDRCC.S7_5 IL68_02-07_12.DDRCC.S8_5 IL68_02-07_12.DDRCC.S9_5 IL68_02-07_12.DDRCC.S10_5 IL68_02-07_12.DDRCC.S11_5 IL68_02-07_12.DDRCC.S12_5 IL68_02-07_12.DDRCC.S13_5 IL68_02-07_12.DDRCC.S14_5 IL68_02-07_12.DDRCC.S15_5 IL68_02-07_12.DDRCC.S16_5 IL68_02-07_12.DDRCC.S17_5 IL68_02-07_12.DDRCC.S18_5 IL68_02-07_12.DDRCC.S19_5 IL68_02-07_12.DDRCC.S20_5 IL68_02-07_12.DDRCC.S21_5 IL68_02-07_12.DDRCC.S22_5 IL68_02-07_12.DDRCC.S23_5 IL68_02-07_12.DDRCC.S24_5 IL68_02-07_12.DDRCC.S25_5 IL68_02-07_12.DDRCC.S26_5 IL68_02-07_12.DDRCC.S27_5 IL68_02-07_12.DDRCC.S28_5 IL68_02-07_12.DDRCC.S29_5 IL68_02-07_12.DDRCC.S30_5 IL68_02-07_12.DDRCC.S31_5 IL68_02-07_12.DDRCC.S32_5 IL68_02-07_12.DDRCC.S33_5 IL68_02-07_12.DDRCC.S34_5 IL68_02-07_12.DDRCC.S35_5 IL68_02-07_12.DDRCC.S36_5 IL68_02-07_12.DDRCC.S37_5 IL68_02-07_12.DDRCC.S38_5 IL68_02-07_12.DDRCC.S39_5 IL68_02-07_12.DDRCC.S40_5 IL68_02-07_12.DDRCC.S41_5 IL68_02-07_12.DDRCC.S42_5 IL68_02-07_12.DDRCC.S43_5 IL68_02-07_12.DDRCC.S44_5 IL68_02-07_12.DDRCC.S45_5 IL68_02-07_12.DDRCC.S46_5 IL68_02-07_12.SDRCC.GPIO8.D0_5 IL68_02-07_12.SDRCC.GPIO8.D1_5 IL68_02-07_12.SDRCC.GPIO8.D2_5 IL68_02-07_12.SDRCC.GPIO8.D3_5 IL68_02-07_12.SDRCC.GPIO8.D4_5 IL68_02-07_12.SDRCC.GPIO8.D5_5 IL68_02-07_12.SDRCC.GPIO8.D6_5 IL68_02-07_12.SDRCC.GPIO8.D7_5 IL68_02-07_12.SDRCC.GPIO15.D01C_5_N IL68_02-07_12.SDRCC.GPIO15.D01C_5_P IL68_02-07_12.SDRCC.GPIO15.D2_5 IL68_02-07_12.SDRCC.GPIO15.D3_5 IL68_02-07_12.SDRCC.GPIO15.D4_5 IL68_02-07_12.SDRCC.GPIO15.D5_5 IL68_02-07_12.SDRCC.GPIO15.D6_5 IL68_02-07_12.SDRCC.GPIO15.D7_5 IL68_02-07_12.SDRCC.GPIO15.D8_5 IL68_02-07_12.SDRCC.GPIO15.D9_5 IL68_02-07_12.SDRCC.GPIO15.D10_5 IL68_02-07_12.SDRCC.GPIO15.D11_5 IL68_02-07_12.SDRCC.GPIO15.D12_5 IL68_02-07_12.SDRCC.GPIO15.D13_5 IL68_02-07_12.SDRCC.GPIO15.D14_5
net class IL68_03-07_13: IL68_03-07_13.DDRCC.S01C_5_N IL68_03-07_13.DDRCC.S01C_5_P IL68_03-07_13.DDRCC.S2_5 IL68_03-07_13.DDRCC.S3_5 IL68_03-07_13.DDRCC.S4_5 IL68_03-07_13.DDRCC.S5_5 IL68_03-07_13.DDRCC.S6_5 IL68_03-07_13.DDRCC.S7_5 IL68_03-07_13.DDRCC.S8_5 IL68_03-07_13.DDRCC.S9_5 IL68_03-07_13.DDRCC.S10_5 IL68_03-07_13.DDRCC.S11_5 IL68_03-07_13.DDRCC.S12_5 IL68_03-07_13.DDRCC.S13_5 IL68_03-07_13.DDRCC.S14_5 IL68_03-07_13.DDRCC.S15_5 IL68_03-07_13.DDRCC.S16_5 IL68_03-07_13.DDRCC.S17_5 IL68_03-07_13.DDRCC.S18_5 IL68_03-07_13.DDRCC.S19_5 IL68_03-07_13.DDRCC.S20_5 IL68_03-07_13.DDRCC.S21_5 IL68_03-07_13.DDRCC.S22_5 IL68_03-07_13.DDRCC.S23_5 IL68_03-07_13.DDRCC.S24_5 IL68_03-07_13.DDRCC.S25_5 IL68_03-07_13.DDRCC.S26_5 IL68_03-07_13.DDRCC.S27_5 IL68_03-07_13.DDRCC.S28_5 IL68_03-07_13.DDRCC.S29_5 IL68_03-07_13.DDRCC.S30_5 IL68_03-07_13.DDRCC.S31_5 IL68_03-07_13.DDRCC.S32_5 IL68_03-07_13.DDRCC.S33_5 IL68_03-07_13.DDRCC.S34_5 IL68_03-07_13.DDRCC.S35_5 IL68_03-07_13.DDRCC.S36_5 IL68_03-07_13.DDRCC.S37_5 IL68_03-07_13.DDRCC.S38_5 IL68_03-07_13.DDRCC.S39_5 IL68_03-07_13.DDRCC.S40_5 IL68_03-07_13.DDRCC.S41_5 IL68_03-07_13.DDRCC.S42_5 IL68_03-07_13.DDRCC.S43_5 IL68_03-07_13.DDRCC.S44_5 IL68_03-07_13.DDRCC.S45_5 IL68_03-07_13.DDRCC.S46_5 IL68_03-07_13.SDRCC.GPIO8.D0_5 IL68_03-07_13.SDRCC.GPIO8.D1_5 IL68_03-07_13.SDRCC.GPIO8.D2_5 IL68_03-07_13.SDRCC.GPIO8.D3_5 IL68_03-07_13.SDRCC.GPIO8.D4_5 IL68_03-07_13.SDRCC.GPIO8.D5_5 IL68_03-07_13.SDRCC.GPIO8.D6_5 IL68_03-07_13.SDRCC.GPIO8.D7_5 IL68_03-07_13.SDRCC.GPIO15.D01C_5_N IL68_03-07_13.SDRCC.GPIO15.D01C_5_P IL68_03-07_13.SDRCC.GPIO15.D2_5 IL68_03-07_13.SDRCC.GPIO15.D3_5 IL68_03-07_13.SDRCC.GPIO15.D4_5 IL68_03-07_13.SDRCC.GPIO15.D5_5 IL68_03-07_13.SDRCC.GPIO15.D6_5 IL68_03-07_13.SDRCC.GPIO15.D7_5 IL68_03-07_13.SDRCC.GPIO15.D8_5 IL68_03-07_13.SDRCC.GPIO15.D9_5 IL68_03-07_13.SDRCC.GPIO15.D10_5 IL68_03-07_13.SDRCC.GPIO15.D11_5 IL68_03-07_13.SDRCC.GPIO15.D12_5 IL68_03-07_13.SDRCC.GPIO15.D13_5 IL68_03-07_13.SDRCC.GPIO15.D14_5
net class IL68_10-J3B: IL68_10-J3B.DDRCC.S01C_5_N IL68_10-J3B.DDRCC.S01C_5_P IL68_10-J3B.DDRCC.S2_5 IL68_10-J3B.DDRCC.S3_5 IL68_10-J3B.DDRCC.S4_5 IL68_10-J3B.DDRCC.S5_5 IL68_10-J3B.DDRCC.S6_5 IL68_10-J3B.DDRCC.S7_5 IL68_10-J3B.DDRCC.S8_5 IL68_10-J3B.DDRCC.S9_5 IL68_10-J3B.DDRCC.S10_5 IL68_10-J3B.DDRCC.S11_5 IL68_10-J3B.DDRCC.S12_5 IL68_10-J3B.DDRCC.S13_5 IL68_10-J3B.DDRCC.S14_5 IL68_10-J3B.DDRCC.S15_5 IL68_10-J3B.DDRCC.S16_5 IL68_10-J3B.DDRCC.S17_5 IL68_10-J3B.DDRCC.S18_5 IL68_10-J3B.DDRCC.S19_5 IL68_10-J3B.DDRCC.S20_5 IL68_10-J3B.DDRCC.S21_5 IL68_10-J3B.DDRCC.S22_5 IL68_10-J3B.DDRCC.S23_5 IL68_10-J3B.DDRCC.S24_5 IL68_10-J3B.DDRCC.S25_5 IL68_10-J3B.DDRCC.S26_5 IL68_10-J3B.DDRCC.S27_5 IL68_10-J3B.DDRCC.S28_5 IL68_10-J3B.DDRCC.S29_5 IL68_10-J3B.DDRCC.S30_5 IL68_10-J3B.DDRCC.S31_5 IL68_10-J3B.DDRCC.S32_5 IL68_10-J3B.DDRCC.S33_5 IL68_10-J3B.DDRCC.S34_5 IL68_10-J3B.DDRCC.S35_5 IL68_10-J3B.DDRCC.S36_5 IL68_10-J3B.DDRCC.S37_5 IL68_10-J3B.DDRCC.S38_5 IL68_10-J3B.DDRCC.S39_5 IL68_10-J3B.DDRCC.S40_5 IL68_10-J3B.DDRCC.S41_5 IL68_10-J3B.DDRCC.S42_5 IL68_10-J3B.DDRCC.S43_5 IL68_10-J3B.DDRCC.S44_5 IL68_10-J3B.DDRCC.S45_5 IL68_10-J3B.DDRCC.S46_5 IL68_10-J3B.SDRCC.GPIO8.D0_5 IL68_10-J3B.SDRCC.GPIO8.D1_5 IL68_10-J3B.SDRCC.GPIO8.D2_5 IL68_10-J3B.SDRCC.GPIO8.D3_5 IL68_10-J3B.SDRCC.GPIO8.D4_5 IL68_10-J3B.SDRCC.GPIO8.D5_5 IL68_10-J3B.SDRCC.GPIO8.D6_5 IL68_10-J3B.SDRCC.GPIO8.D7_5 IL68_10-J3B.SDRCC.GPIO15.D01C_5_N IL68_10-J3B.SDRCC.GPIO15.D01C_5_P IL68_10-J3B.SDRCC.GPIO15.D2_5 IL68_10-J3B.SDRCC.GPIO15.D3_5 IL68_10-J3B.SDRCC.GPIO15.D4_5 IL68_10-J3B.SDRCC.GPIO15.D5_5 IL68_10-J3B.SDRCC.GPIO15.D6_5 IL68_10-J3B.SDRCC.GPIO15.D7_5 IL68_10-J3B.SDRCC.GPIO15.D8_5 IL68_10-J3B.SDRCC.GPIO15.D9_5 IL68_10-J3B.SDRCC.GPIO15.D10_5 IL68_10-J3B.SDRCC.GPIO15.D11_5 IL68_10-J3B.SDRCC.GPIO15.D12_5 IL68_10-J3B.SDRCC.GPIO15.D13_5 IL68_10-J3B.SDRCC.GPIO15.D14_5
net class IL68_20-J4A: IL68_20-J4A.DDRCC.S01C_5_N IL68_20-J4A.DDRCC.S01C_5_P IL68_20-J4A.DDRCC.S2_5 IL68_20-J4A.DDRCC.S3_5 IL68_20-J4A.DDRCC.S4_5 IL68_20-J4A.DDRCC.S5_5 IL68_20-J4A.DDRCC.S6_5 IL68_20-J4A.DDRCC.S7_5 IL68_20-J4A.DDRCC.S8_5 IL68_20-J4A.DDRCC.S9_5 IL68_20-J4A.DDRCC.S10_5 IL68_20-J4A.DDRCC.S11_5 IL68_20-J4A.DDRCC.S12_5 IL68_20-J4A.DDRCC.S13_5 IL68_20-J4A.DDRCC.S14_5 IL68_20-J4A.DDRCC.S15_5 IL68_20-J4A.DDRCC.S16_5 IL68_20-J4A.DDRCC.S17_5 IL68_20-J4A.DDRCC.S18_5 IL68_20-J4A.DDRCC.S19_5 IL68_20-J4A.DDRCC.S20_5 IL68_20-J4A.DDRCC.S21_5 IL68_20-J4A.DDRCC.S22_5 IL68_20-J4A.DDRCC.S23_5 IL68_20-J4A.DDRCC.S24_5 IL68_20-J4A.DDRCC.S25_5 IL68_20-J4A.DDRCC.S26_5 IL68_20-J4A.DDRCC.S27_5 IL68_20-J4A.DDRCC.S28_5 IL68_20-J4A.DDRCC.S29_5 IL68_20-J4A.DDRCC.S30_5 IL68_20-J4A.DDRCC.S31_5 IL68_20-J4A.DDRCC.S32_5 IL68_20-J4A.DDRCC.S33_5 IL68_20-J4A.DDRCC.S34_5 IL68_20-J4A.DDRCC.S35_5 IL68_20-J4A.DDRCC.S36_5 IL68_20-J4A.DDRCC.S37_5 IL68_20-J4A.DDRCC.S38_5 IL68_20-J4A.DDRCC.S39_5 IL68_20-J4A.DDRCC.S40_5 IL68_20-J4A.DDRCC.S41_5 IL68_20-J4A.DDRCC.S42_5 IL68_20-J4A.DDRCC.S43_5 IL68_20-J4A.DDRCC.S44_5 IL68_20-J4A.DDRCC.S45_5 IL68_20-J4A.DDRCC.S46_5 IL68_20-J4A.SDRCC.GPIO8.D0_5 IL68_20-J4A.SDRCC.GPIO8.D1_5 IL68_20-J4A.SDRCC.GPIO8.D2_5 IL68_20-J4A.SDRCC.GPIO8.D3_5 IL68_20-J4A.SDRCC.GPIO8.D4_5 IL68_20-J4A.SDRCC.GPIO8.D5_5 IL68_20-J4A.SDRCC.GPIO8.D6_5 IL68_20-J4A.SDRCC.GPIO8.D7_5 IL68_20-J4A.SDRCC.GPIO15.D01C_5_N IL68_20-J4A.SDRCC.GPIO15.D01C_5_P IL68_20-J4A.SDRCC.GPIO15.D2_5 IL68_20-J4A.SDRCC.GPIO15.D3_5 IL68_20-J4A.SDRCC.GPIO15.D4_5 IL68_20-J4A.SDRCC.GPIO15.D5_5 IL68_20-J4A.SDRCC.GPIO15.D6_5 IL68_20-J4A.SDRCC.GPIO15.D7_5 IL68_20-J4A.SDRCC.GPIO15.D8_5 IL68_20-J4A.SDRCC.GPIO15.D9_5 IL68_20-J4A.SDRCC.GPIO15.D10_5 IL68_20-J4A.SDRCC.GPIO15.D11_5 IL68_20-J4A.SDRCC.GPIO15.D12_5 IL68_20-J4A.SDRCC.GPIO15.D13_5 IL68_20-J4A.SDRCC.GPIO15.D14_5
net class IL68_30-J4B: IL68_30-J4B.DDRCC.S01C_5_N IL68_30-J4B.DDRCC.S01C_5_P IL68_30-J4B.DDRCC.S2_5 IL68_30-J4B.DDRCC.S3_5 IL68_30-J4B.DDRCC.S4_5 IL68_30-J4B.DDRCC.S5_5 IL68_30-J4B.DDRCC.S6_5 IL68_30-J4B.DDRCC.S7_5 IL68_30-J4B.DDRCC.S8_5 IL68_30-J4B.DDRCC.S9_5 IL68_30-J4B.DDRCC.S10_5 IL68_30-J4B.DDRCC.S11_5 IL68_30-J4B.DDRCC.S12_5 IL68_30-J4B.DDRCC.S13_5 IL68_30-J4B.DDRCC.S14_5 IL68_30-J4B.DDRCC.S15_5 IL68_30-J4B.DDRCC.S16_5 IL68_30-J4B.DDRCC.S17_5 IL68_30-J4B.DDRCC.S18_5 IL68_30-J4B.DDRCC.S19_5 IL68_30-J4B.DDRCC.S20_5 IL68_30-J4B.DDRCC.S21_5 IL68_30-J4B.DDRCC.S22_5 IL68_30-J4B.DDRCC.S23_5 IL68_30-J4B.DDRCC.S24_5 IL68_30-J4B.DDRCC.S25_5 IL68_30-J4B.DDRCC.S26_5 IL68_30-J4B.DDRCC.S27_5 IL68_30-J4B.DDRCC.S28_5 IL68_30-J4B.DDRCC.S29_5 IL68_30-J4B.DDRCC.S30_5 IL68_30-J4B.DDRCC.S31_5 IL68_30-J4B.DDRCC.S32_5 IL68_30-J4B.DDRCC.S33_5 IL68_30-J4B.DDRCC.S34_5 IL68_30-J4B.DDRCC.S35_5 IL68_30-J4B.DDRCC.S36_5 IL68_30-J4B.DDRCC.S37_5 IL68_30-J4B.DDRCC.S38_5 IL68_30-J4B.DDRCC.S39_5 IL68_30-J4B.DDRCC.S40_5 IL68_30-J4B.DDRCC.S41_5 IL68_30-J4B.DDRCC.S42_5 IL68_30-J4B.DDRCC.S43_5 IL68_30-J4B.DDRCC.S44_5 IL68_30-J4B.DDRCC.S45_5 IL68_30-J4B.DDRCC.S46_5 IL68_30-J4B.SDRCC.GPIO8.D0_5 IL68_30-J4B.SDRCC.GPIO8.D1_5 IL68_30-J4B.SDRCC.GPIO8.D2_5 IL68_30-J4B.SDRCC.GPIO8.D3_5 IL68_30-J4B.SDRCC.GPIO8.D4_5 IL68_30-J4B.SDRCC.GPIO8.D5_5 IL68_30-J4B.SDRCC.GPIO8.D6_5 IL68_30-J4B.SDRCC.GPIO8.D7_5 IL68_30-J4B.SDRCC.GPIO15.D01C_5_N IL68_30-J4B.SDRCC.GPIO15.D01C_5_P IL68_30-J4B.SDRCC.GPIO15.D2_5 IL68_30-J4B.SDRCC.GPIO15.D3_5 IL68_30-J4B.SDRCC.GPIO15.D4_5 IL68_30-J4B.SDRCC.GPIO15.D5_5 IL68_30-J4B.SDRCC.GPIO15.D6_5 IL68_30-J4B.SDRCC.GPIO15.D7_5 IL68_30-J4B.SDRCC.GPIO15.D8_5 IL68_30-J4B.SDRCC.GPIO15.D9_5 IL68_30-J4B.SDRCC.GPIO15.D10_5 IL68_30-J4B.SDRCC.GPIO15.D11_5 IL68_30-J4B.SDRCC.GPIO15.D12_5 IL68_30-J4B.SDRCC.GPIO15.D13_5 IL68_30-J4B.SDRCC.GPIO15.D14_5